# EAGLE board PC (EAGLE 9.6.2)

Size 160 x 100 mm. Coordinates in mm from the lower left corner, seen from the top.
Outline: 0,0 160,0 160,100 0,100 0,0
Copper layers (1*16): Top 0.035mm / dielectric 1.5mm / Bottom 0.035mm
Design rules "default": minimum track width 6mil, minimum drill 0.35mm, track to track 6mil, track to pad 6mil, pad to pad 6mil, via to via 6mil, smd to smd 6mil, copper to edge 40mil, drill to drill 6mil, minimum pad ring 10mil, minimum via ring 8mil, stop-mask expansion 4mil, vias tented up to drill 0mil, thermal gap 10mil

## Footprints (pad centres in the part's own frame; a part is rotated, then mirrored left to right if it is on the bottom)
1X01 = drill 1.016 octagon: 1 0,0
DIL14 = drill 0.813 long: 1 -7.62,-3.81; 2 -5.08,-3.81; 3 -2.54,-3.81; 4 0,-3.81; 5 2.54,-3.81; 6 5.08,-3.81; 7 7.62,-3.81; 8 7.62,3.81; 9 5.08,3.81; 10 2.54,3.81; 11 0,3.81; 12 -2.54,3.81; 13 -5.08,3.81; 14 -7.62,3.81
DIL20 = drill 0.813 long: 1 -11.43,-3.81; 2 -8.89,-3.81; 3 -6.35,-3.81; 4 -3.81,-3.81; 5 -1.27,-3.81; 6 1.27,-3.81; 7 3.81,-3.81; 8 6.35,-3.81; 9 8.89,-3.81; 10 11.43,-3.81; 11 11.43,3.81; 12 8.89,3.81; 13 6.35,3.81; 14 3.81,3.81; 15 1.27,3.81; 16 -1.27,3.81; 17 -3.81,3.81; 18 -6.35,3.81; 19 -8.89,3.81; 20 -11.43,3.81
1X08 = drill 1.016 long: 1 -8.89,0; 2 -6.35,0; 3 -3.81,0; 4 -1.27,0; 5 1.27,0; 6 3.81,0; 7 6.35,0; 8 8.89,0
1X02 = drill 1.016 long: 1 -1.27,0; 2 1.27,0

## Placement (x,y rotation side)
CLR  [1X01]  2.54,-60.96 0 top  (outside the outline)
EN  [1X01]  2.54,-55.88 0 top  (outside the outline)
IC1  [DIL14]  11.43,-6.35 0 top
IC2  [DIL14]  11.43,-17.78 0 top  (outside the outline)
IC3  [DIL14]  11.43,-29.21 0 top  (outside the outline)
IC4  [DIL14]  11.43,-40.64 0 top  (outside the outline)
IC5  [DIL20]  15.24,-97.79 0 top  (outside the outline)
IC6  [DIL20]  15.24,-109.22 0 top  (outside the outline)
INC  [1X01]  2.54,-66.04 0 top  (outside the outline)
JP1  [1X08]  11.43,-125.73 0 top  (outside the outline)
JP2  [1X08]  11.43,-132.08 0 top  (outside the outline)
JP5  [1X02]  3.81,-119.38 0 top  (outside the outline)
LDP  [1X01]  2.54,-50.8 0 top  (outside the outline)

## Library data of the parts
CLR EN INC JP1 JP2 JP5 LDP = pinhead
IC1-IC6 = ic-package

## Nets
EN: EN.1 IC5.19 IC6.19
GND: IC1.7 IC2.7 IC3.7 IC4.7 IC5.1 IC5.10 IC6.1 IC6.10 JP5.2
N$1: IC1.1 IC2.1 IC3.1 IC4.1 LDP.1
N$2: CLR.1 IC1.13 IC2.13 IC3.13 IC4.13
N$3: IC1.8 INC.1
P0: IC1.4 IC5.2 JP1.1
P1: IC1.10 IC5.3 JP1.2
P2: IC1.3 IC5.4 JP1.3
P3: IC1.11 IC5.5 JP1.4
P4: IC2.4 IC5.6 JP1.5
P5: IC2.10 IC5.7 JP1.6
P6: IC2.3 IC5.8 JP1.7
P7: IC2.11 IC5.9 JP1.8
P8: IC3.4 IC6.2 JP2.1
P9: IC3.10 IC6.3 JP2.2
P10: IC3.3 IC6.4 JP2.3
P11: IC3.11 IC6.5 JP2.4
P12: IC4.4 IC6.6 JP2.5
P13: IC4.10 IC6.7 JP2.6
P14: IC4.3 IC6.8 JP2.7
P15: IC4.11 IC6.9 JP2.8
Q0: IC1.5 IC1.6 IC5.18
Q1: IC1.9 IC5.17
Q2: IC1.2 IC5.16
Q3: IC1.12 IC2.8 IC5.15
Q4: IC2.5 IC2.6 IC5.14
Q5: IC2.9 IC5.13
Q6: IC2.2 IC5.12
Q7: IC2.12 IC3.8 IC5.11
Q8: IC3.5 IC3.6 IC6.18
Q9: IC3.9 IC6.17
Q10: IC3.2 IC6.16
Q11: IC3.12 IC4.8 IC6.15
Q12: IC4.5 IC4.6 IC6.14
Q13: IC4.9 IC6.13
Q14: IC4.2 IC6.12
Q15: IC4.12 IC6.11
VCC: IC1.14 IC2.14 IC3.14 IC4.14 IC5.20 IC6.20 JP5.1

## Tracks (layer width: path | path; a pad name or v marks a point on that pad's centre or on a via)
EN  (2 unrouted)
GND  (8 unrouted)
N$1  (4 unrouted)
N$2  (4 unrouted)
N$3  (1 unrouted)
P0  (2 unrouted)
P1  (2 unrouted)
P2  (2 unrouted)
P3  (2 unrouted)
P4  (2 unrouted)
P5  (2 unrouted)
P6  (2 unrouted)
P7  (2 unrouted)
P8  (2 unrouted)
P9  (2 unrouted)
P10  (2 unrouted)
P11  (2 unrouted)
P12  (2 unrouted)
P13  (2 unrouted)
P14  (2 unrouted)
P15  (2 unrouted)
Q0  (2 unrouted)
Q1  (1 unrouted)
Q2  (1 unrouted)
Q3  (2 unrouted)
Q4  (2 unrouted)
Q5  (1 unrouted)
Q6  (1 unrouted)
Q7  (2 unrouted)
Q8  (2 unrouted)
Q9  (1 unrouted)
Q10  (1 unrouted)
Q11  (2 unrouted)
Q12  (2 unrouted)
Q13  (1 unrouted)
Q14  (1 unrouted)
Q15  (1 unrouted)
VCC  (6 unrouted)